# EAGLE board CRD (EAGLE 9.5.2)

Size 160 x 100 mm. Coordinates in mm from the lower left corner, seen from the top.
Outline: 0,0 160,0 160,100 0,100 0,0
Copper layers (1*16): Top 0.035mm / dielectric 1.5mm / Bottom 0.035mm
Design rules "default": minimum track width 6mil, minimum drill 0.35mm, track to track 6mil, track to pad 6mil, pad to pad 6mil, via to via 6mil, smd to smd 6mil, copper to edge 40mil, drill to drill 6mil, minimum pad ring 10mil, minimum via ring 8mil, stop-mask expansion 4mil, vias tented up to drill 0mil, thermal gap 10mil

## Footprints (pad centres in the part's own frame; a part is rotated, then mirrored left to right if it is on the bottom)
RES_1206 = smd 1.08 x 1.68: 1 -1.445,0; 2 1.445,0
MOLEX_73366-0061_0 = drill 1.17 pad 1.82 square: 1 0,0 | drill 1.52 pad 2.32: 2 -2.54,2.54; 3 2.54,2.54; 4 -2.54,-2.54; 5 2.54,-2.54
CAP_1206 = smd 1.29 x 1.91: 1 -1.46,0; 2 1.46,0
CAPPRD150W45D400H700 = drill 0.7 pad 1.05: N 0.75,0 | drill 0.7 pad 1.05 square: P -0.75,0
SOIC127P600X155-14N = smd 1.968 x 0.589: 1 -2.473,3.81; 2 -2.473,2.54; 3 -2.473,1.27; 4 -2.473,0; 5 -2.473,-1.27; 6 -2.473,-2.54; 7 -2.473,-3.81; 8 2.473,-3.81; 9 2.473,-2.54; 10 2.473,-1.27; 11 2.473,0; 12 2.473,1.27; 13 2.473,2.54; 14 2.473,3.81
SOIC127P1032X265-8N = smd 2.052 x 0.602: 1 -4.654,1.905; 2 -4.654,0.635; 3 -4.654,-0.635; 4 -4.654,-1.905; 5 4.654,-1.905; 6 4.654,-0.635; 7 4.654,0.635; 8 4.654,1.905
DO35-10 = drill 0.813 long: A 5.08,0; C -5.08,0
SOIC127P1032X265-16N = smd 2.052 x 0.602: 1 -4.654,4.445; 2 -4.654,3.175; 3 -4.654,1.905; 4 -4.654,0.635; 5 -4.654,-0.635; 6 -4.654,-1.905; 7 -4.654,-3.175; 8 -4.654,-4.445; 9 4.654,-4.445; 10 4.654,-3.175; 11 4.654,-1.905; 12 4.654,-0.635; 13 4.654,0.635; 14 4.654,1.905; 15 4.654,3.175; 16 4.654,4.445
1X04 = drill 1.016 long: 1 -3.81,0; 2 -1.27,0; 3 1.27,0; 4 3.81,0
1X02 = drill 1.016 long: 1 -1.27,0; 2 1.27,0
L1812 = smd 1.9 x 3.4: 1 -1.95,0; 2 1.95,0
1X08 = drill 1.016 long: 1 -8.89,0; 2 -6.35,0; 3 -3.81,0; 4 -1.27,0; 5 1.27,0; 6 3.81,0; 7 6.35,0; 8 8.89,0
SOIC127P600X175-16N = smd 1.746 x 0.592: 1 -2.585,4.445; 2 -2.585,3.175; 3 -2.585,1.905; 4 -2.585,0.635; 5 -2.585,-0.635; 6 -2.585,-1.905; 7 -2.585,-3.175; 8 -2.585,-4.445; 9 2.585,-4.445; 10 2.585,-3.175; 11 2.585,-1.905; 12 2.585,-0.635; 13 2.585,0.635; 14 2.585,1.905; 15 2.585,3.175; 16 2.585,4.445
SOT95P240X110-6N = smd 1.18 x 0.609: 1 -1.024,0.95; 2 -1.024,0; 3 -1.024,-0.95; 4 1.024,-0.95; 5 1.024,0; 6 1.024,0.95
1S7A_0505D15UP = drill 1 pad 1.5: 1 0,0; 2 2.54,0; 4 7.62,0; 5 10.16,0; 6 12.7,0
RESAD724W46L381D178B = drill 0.66 pad 1.26: 1 -3.62,0; 2 3.62,0
SOP65P490X110-8N = smd 1.939 x 0.497: 1 -1.915,0.975; 2 -1.915,0.325; 3 -1.915,-0.325; 4 -1.915,-0.975; 5 1.915,-0.975; 6 1.915,-0.325; 7 1.915,0.325; 8 1.915,0.975
DFN-8-EXTRA = smd 0.5 x 1.8: 0 0,0 | smd 0.6 x 0.3: 1 -0.9,0.75; 2 -0.9,0.25; 3 -0.9,-0.25; 4 -0.9,-0.75; 5 0.9,-0.75; 6 0.9,0.25; 7 0.9,-0.25; 8 0.9,0.75

## Placement (x,y rotation side)
52.3  100k  [RES_1206]  -85.09,-35.56 0 top  (outside the outline)
BIAS  MOLEX_73366-0061MOLEX_73366-0061_0_0  [MOLEX_73366-0061_0]  -77.47,34.29 0 top  (outside the outline)
C1  0.1u  [CAP_1206]  -81.28,54.61 0 top  (outside the outline)
C2  6.8u  [CAPPRD150W45D400H700]  -15.24,45.72 0 top  (outside the outline)
C3  0.1u  [CAP_1206]  -15.24,64.77 0 top  (outside the outline)
C4  6.8u  [CAPPRD150W45D400H700]  -21.59,45.72 0 top  (outside the outline)
C5  0.1u  [CAP_1206]  -21.59,64.77 0 top  (outside the outline)
C6  6.8u  [CAPPRD150W45D400H700]  -27.94,45.72 0 top  (outside the outline)
C7  0.1u  [CAP_1206]  -27.94,64.77 0 top  (outside the outline)
C8  6.8u  [CAPPRD150W45D400H700]  -34.29,45.72 0 top  (outside the outline)
C9  0.1u  [CAP_1206]  -34.29,64.77 0 top  (outside the outline)
C10  0.1u  [CAP_1206]  -40.64,64.77 0 top  (outside the outline)
C11  6.8u  [CAPPRD150W45D400H700]  -40.64,45.72 0 top  (outside the outline)
C12  6.8u  [CAPPRD150W45D400H700]  -46.99,45.72 0 top  (outside the outline)
C13  0.1u  [CAP_1206]  -46.99,64.77 0 top  (outside the outline)
C14  0.1u  [CAP_1206]  -53.34,64.77 0 top  (outside the outline)
C15  4.7u  [CAP_1206]  -59.69,64.77 0 top  (outside the outline)
C16  4.7u  [CAP_1206]  -66.04,64.77 0 top  (outside the outline)
C17  0.1u  [CAP_1206]  -72.39,64.77 0 top  (outside the outline)
C18  6.8u  [CAPPRD150W45D400H700]  -53.34,45.72 0 top  (outside the outline)
C19  6.8u  [CAPPRD150W45D400H700]  -59.69,45.72 0 top  (outside the outline)
C20  6.8u  [CAPPRD150W45D400H700]  -66.04,45.72 0 top  (outside the outline)
C21  0.1u  [CAP_1206]  -85.09,-13.97 0 top  (outside the outline)
C22  100p  [CAP_1206]  -85.09,-41.91 0 top  (outside the outline)
C23  0.1u  [CAP_1206]  10.16,85.09 0 top
C24  6.8u  [CAPPRD150W45D400H700]  -72.39,45.72 0 top  (outside the outline)
C25  0.1u  [CAP_1206]  -15.24,72.39 0 top  (outside the outline)
C26  6.8u  [CAPPRD150W45D400H700]  -78.74,45.72 0 top  (outside the outline)
C27  0.1u  [CAP_1206]  -21.59,72.39 0 top  (outside the outline)
C28  6.8u  [CAPPRD150W45D400H700]  -15.24,55.88 0 top  (outside the outline)
C29  0.1u  [CAP_1206]  -27.94,72.39 0 top  (outside the outline)
C30  6.8u  [CAPPRD150W45D400H700]  -21.59,55.88 0 top  (outside the outline)
C31  0.1u  [CAP_1206]  -34.29,72.39 0 top  (outside the outline)
C32  6.8u  [CAPPRD150W45D400H700]  -27.94,55.88 0 top  (outside the outline)
C33  0.1u  [CAP_1206]  -40.64,72.39 0 top  (outside the outline)
C34  6.8u  [CAPPRD150W45D400H700]  -34.29,55.88 0 top  (outside the outline)
C35  0.1u  [CAP_1206]  -46.99,72.39 0 top  (outside the outline)
C36  6.8u  [CAPPRD150W45D400H700]  -40.64,55.88 0 top  (outside the outline)
C37  0.1u  [CAP_1206]  -53.34,72.39 0 top  (outside the outline)
C38  0.1u  [CAP_1206]  -59.69,72.39 0 top  (outside the outline)
C39  0.1u  [CAP_1206]  -66.04,72.39 0 top  (outside the outline)
C40  6.8u  [CAPPRD150W45D400H700]  -46.99,55.88 0 top  (outside the outline)
C41  6.8u  [CAPPRD150W45D400H700]  -53.34,55.88 0 top  (outside the outline)
C42  6.8u  [CAPPRD150W45D400H700]  -59.69,55.88 0 top  (outside the outline)
C43  47n  [CAP_1206]  -85.09,-21.59 0 top  (outside the outline)
C44  47n  [CAP_1206]  -85.09,-29.21 0 top  (outside the outline)
COMP0  [SOIC127P600X155-14N]  -49.53,5.08 0 top  (outside the outline)
COMP1  [SOIC127P600X155-14N]  -57.15,5.08 0 top  (outside the outline)
COMP2  [SOIC127P600X155-14N]  -64.77,5.08 0 top  (outside the outline)
COMP3  [SOIC127P600X155-14N]  -72.39,5.08 0 top  (outside the outline)
COMP4  [SOIC127P600X155-14N]  -80.01,5.08 0 top  (outside the outline)
COMP5  [SOIC127P600X155-14N]  -16.51,22.86 0 top  (outside the outline)
COUNT0  [SOIC127P1032X265-8N]  -26.67,21.59 0 top  (outside the outline)
COUNT1  [SOIC127P1032X265-8N]  -39.37,21.59 0 top  (outside the outline)
COUNT2  [SOIC127P1032X265-8N]  -52.07,21.59 0 top  (outside the outline)
COUNT3  [SOIC127P1032X265-8N]  -64.77,21.59 0 top  (outside the outline)
COUNT4  [SOIC127P1032X265-8N]  -77.47,21.59 0 top  (outside the outline)
COUNT5  [SOIC127P1032X265-8N]  -19.05,34.29 0 top  (outside the outline)
COUNT6  [SOIC127P1032X265-8N]  -31.75,34.29 0 top  (outside the outline)
COUNT7  [SOIC127P1032X265-8N]  -44.45,34.29 0 top  (outside the outline)
D1  BAT19  [DO35-10]  -76.2,72.39 0 top  (outside the outline)
DAC0  [SOIC127P1032X265-16N]  -19.05,7.62 0 top  (outside the outline)
DAC1  [SOIC127P1032X265-16N]  -31.75,7.62 0 top  (outside the outline)
ENCODER  [1X04]  -91.44,-49.53 0 top  (outside the outline)
I2C  [1X02]  -38.1,83.82 0 top  (outside the outline)
L2  47u  [L1812]  -66.04,54.61 0 top  (outside the outline)
LEVELS  [1X08]  -36.83,77.47 0 top  (outside the outline)
MULT0  [SOIC127P600X175-16N]  -41.91,5.08 0 top  (outside the outline)
POW0  [SOT95P240X110-6N]  17.78,82.55 0 top
POW1  1S7A_0512D1.5UP  [1S7A_0505D15UP]  -69.85,36.83 0 top  (outside the outline)
POWER  [1X02]  -17.78,83.82 0 top  (outside the outline)
PREAMP  [1X02]  -93.98,-63.5 0 top  (outside the outline)
R1  100k  [RES_1206]  -44.45,85.09 0 top  (outside the outline)
R2  100k  [RES_1206]  -49.53,85.09 0 top  (outside the outline)
R3  100k  [RES_1206]  -54.61,85.09 0 top  (outside the outline)
R4  100k  [RES_1206]  -59.69,85.09 0 top  (outside the outline)
R5  100k  [RES_1206]  -64.77,85.09 0 top  (outside the outline)
R6  100k  [RES_1206]  -69.85,85.09 0 top  (outside the outline)
R7  100k  [RES_1206]  -74.93,85.09 0 top  (outside the outline)
R8  100k  [RES_1206]  -80.01,85.09 0 top  (outside the outline)
R9  200k  [RES_1206]  -15.24,91.44 0 top  (outside the outline)
R10  100k  [RES_1206]  -20.32,91.44 0 top  (outside the outline)
R11  0  [RESAD724W46L381D178B]  -92.71,-55.88 0 top  (outside the outline)
R14  100k  [RES_1206]  -25.4,91.44 0 top  (outside the outline)
R15  100k  [RES_1206]  -30.48,91.44 0 top  (outside the outline)
R16  100k  [RES_1206]  -35.56,91.44 0 top  (outside the outline)
R17  100k  [RES_1206]  -40.64,91.44 0 top  (outside the outline)
R18  100k  [RES_1206]  -45.72,91.44 0 top  (outside the outline)
R19  100k  [RES_1206]  -50.8,91.44 0 top  (outside the outline)
R22  147k  [RES_1206]  -55.88,91.44 0 top  (outside the outline)
R23  6.34k  [RES_1206]  -60.96,91.44 0 top  (outside the outline)
RTD0  [SOP65P490X110-8N]  -22.86,77.47 0 top  (outside the outline)
RTD1  [1X04]  -53.34,77.47 0 top  (outside the outline)
RTD2  [1X04]  -64.77,77.47 0 top  (outside the outline)
SIGNAL  MOLEX_73366-0061MOLEX_73366-0061_0_0  [MOLEX_73366-0061_0]  -92.71,-40.64 0 top  (outside the outline)
U1  AD8317L  [DFN-8-EXTRA]  -86.36,2.54 0 top  (outside the outline)

## Library data of the parts
52.3 R1-R10 R14-R19 R22 R23 = Resistor_Capacitor; CREATED_BY: PCBLayout.com; DIGIKEY_PART_NUMBER: P0.0ETR-ND; MANUFACTURER: Panasonic Electronic Components; MPN: ERJ-8GEY0R00V; PACKAGE: SMD 1206
BIAS SIGNAL = Molex - 73366-0061; AUTOMOTIVE: No; CENTROID_NOT_SPECIFIED: No; CONN_ORIENTATION: Straight; CONTACT_MATERIAL: Gold,Nickel; DATASHEET: https://www.molex.com/webdocs/datasheets/pdf/en-us/0733660061_RF_COAX_CONNECTORS.pdf; DEVICE_CLASS_L1: Connectors; DEVICE_CLASS_L2: RF / Coaxial Connectors; DEVICE_CLASS_L3: unset; DIELECTRIC_MATERIAL: PTFE; DIGIKEY_DESCRIPTION: CONN MCX JACK STR 50 OHM PCB; DIGIKEY_PART_NUMBER: WM5541-ND; FOOTPRINT_URL: https://www.molex.com/pdm_docs/sd/733660061_sd.pdf; FOOTPRINT_VARIANT_NAME_0: Recommended_Land_Pattern; FREQUENCY: 6GHz; HEIGHT: 5.23mm; IMPEDANCE: 50Ω; IS_FEMALE: yes; LEAD_FREE: Yes; MF: Molex; MFG_PACKAGE_IDENT: 0; MFG_PACKAGE_IDENT_DATE: 0; MFG_PACKAGE_IDENT_REV: 0; MOUSER_DESCRIPTION: RF Connectors / Coaxial Connectors MCX PCB JACK; MOUSER_PART_NUMBER: 538-73366-0061; MPN: 73366-0061; NUMBER_OF_CONTACTS: 1; PACKAGE: CONN_JACK; PREFIX: J; ROHS: Yes; SHIELDING: true; STANDOFF_HEIGHT: 0.05mm; TEMPERATURE_RANGE_HIGH: +155°C; TEMPERATURE_RANGE_LOW: -55°C; VERIFICATION_VERSION: 0.0.0.3; VOLTAGE_RATING: 335V
C1 C3 C5 C7 C9 C10 C13-C17 C21-C23 C25 C27 C29 C31 C33 C35 C37-C39 C43 C44 = Resistor_Capacitor; CREATED_BY: PCBLayout.com; DIGIKEY_PART_NUMBER: GRM31CR60J107ME39L; MANUFACTURER: Murata Electronics North America; MPN: GRM31CR60J107ME39L; PACKAGE: SMD 1206
C2 C4 C6 C8 C11 C12 C18-C20 C24 C26 C28 C30 C32 C34 C36 C40-C42 = EEAGA1V6R8; DESCRIPTION: CAP ALUM 6.8UF 20% 35V RADIAL; DIGI-KEY_PART_NUMBER: P14493-ND; MF: Panasonic; MP: EEAGA1V6R8; PACKAGE: RADIAL-2 Panasonic; PURCHASE-URL: https://pricing.snapeda.com/search/part/EEAGA1V6R8/?ref=eda
COMP0 COMP1-COMP5 COUNT0 COUNT1-COUNT7 DAC0 DAC1 MULT0 POW0 RTD0 = CRD
D1 = diode
ENCODER I2C LEVELS POWER PREAMP RTD1 RTD2 = pinhead
L2 = rcl; SPICEPREFIX: L
POW1 = 1S7A_0512D1.5UP; DESCRIPTION: 1W ? Dual Output DC-DC Converter - Fixed Input - Isolated & Unregulated; HEIGHT: 10.41mm; MANUFACTURER_NAME: Gaptec; MANUFACTURER_PART_NUMBER: 1S7A_0512D1.5UP
R11 = Resistor; CATEGORY: Resistor; SUB-CATEGORY: Fixed
U1 = AD8317; AVAILABILITY: In Stock; DESCRIPTION: Logarithmic Amplifier IC Receiver Signal Strength Indication (RSSI) 8-LFCSP-VD (3x2); MF: Analog Devices; MP: AD8317; PACKAGE: LFCSP-8 Analog Devices; PRICE: None; PURCHASE-URL: https://pricing.snapeda.com/search/part/AD8317/?ref=eda

## Nets
+5V: C1.2 C2.N C3.2 C4.N C5.2 C6.N C7.2 C8.N C9.2 C10.2 C11.N C12.N C13.2 C14.2 C15.2 C17.2 C18.N C19.N C20.N C21.2 C22.2 C23.2 C24.N C25.2 C26.N C27.2 C28.N C29.2 C30.N C31.2 C32.N C33.2 C34.N C35.2 C36.N C37.2 C38.2 C39.2 C40.N C41.N C42.N COMP0.4 COMP1.4 COMP2.4 COMP3.4 COMP4.4 COMP5.4 COUNT0.3 COUNT0.8 COUNT1.3 COUNT1.8 COUNT2.3 COUNT2.8 COUNT3.3 COUNT3.8 COUNT4.8 COUNT5.8 COUNT6.8 COUNT7.8 DAC0.3 DAC0.4 DAC0.12 DAC0.13 DAC0.14 DAC1.3 DAC1.4 DAC1.9 DAC1.12 DAC1.13 DAC1.14 ENCODER.4 L2.2 MULT0.16 POW0.4 POW0.5 POW1.1 POWER.1 R1.1 RTD0.8 RTD2.3 RTD2.4 U1.7
+12V: POW1.6 PREAMP.1
-12V: POW1.4
AND0: COMP2.3 R3.1 R4.1
AND1: COMP2.5 R5.2 R6.2
AND2: COMP2.10 R2.1 R7.1
AND3: COMP2.12 R8.2 R14.2
AND4: COMP5.3 R10.1 R17.1
AND5: COMP5.5 R15.2 R16.2
AND6: COMP5.12 R18.1 R19.1
BIN0: COMP2.1 COUNT0.1
BIN1: COMP2.7 COUNT1.1
BIN2: COMP2.8 COUNT2.1
BIN3: COMP2.14 COUNT3.1
BIN4: COMP5.1 COUNT4.1
BIN5: COMP5.7 COUNT5.1
BIN6: COMP5.14 COUNT6.1
ENCODER: COUNT7.1
GND: 52.3.2 BIAS.2 BIAS.3 BIAS.4 BIAS.5 C1.1 C2.P C3.1 C4.P C5.1 C6.P C7.1 C8.P C9.1 C10.1 C11.P C12.P C13.1 C14.1 C15.1 C16.1 C17.1 C18.P C19.P C20.P C21.1 C22.1 C23.1 C24.P C25.1 C26.P C27.1 C28.P C29.1 C30.P C31.1 C32.P C33.1 C34.P C35.1 C36.P C37.1 C38.1 C39.1 C40.P C41.P C42.P C44.2 COMP0.11 COMP1.11 COMP2.11 COMP3.11 COMP5.11 COUNT0.4 COUNT1.4 COUNT2.4 COUNT3.4 COUNT4.3 COUNT4.4 COUNT5.3 COUNT5.4 COUNT6.3 COUNT6.4 COUNT7.3 COUNT7.4 DAC0.5 DAC0.6 DAC0.9 DAC0.10 DAC0.11 DAC1.5 DAC1.6 DAC1.10 DAC1.11 ENCODER.1 MULT0.1 MULT0.2 MULT0.8 MULT0.13 POW0.1 POW0.2 POW1.2 POW1.5 PREAMP.2 R9.2 R11.2 R23.1 RTD0.4 RTD0.5 RTD0.6 RTD0.7 RTD1.4 RTD2.2 SIGNAL.2 SIGNAL.3 SIGNAL.4 SIGNAL.5
GND2: POWER.2 R11.1
LEVEL0: COMP0.2 DAC0.2 LEVELS.1
LEVEL1: COMP0.5 COMP0.9 DAC0.1 LEVELS.2
LEVEL2: COMP0.12 COMP1.2 DAC0.16 LEVELS.3
LEVEL3: COMP1.5 COMP1.9 DAC0.15 LEVELS.4
LEVEL4: COMP1.12 COMP3.2 DAC1.2 LEVELS.5
LEVEL5: COMP3.5 COMP3.9 DAC1.1 LEVELS.6
LEVEL6: COMP3.12 COMP4.2 DAC1.16 LEVELS.7
LEVEL7: COMP4.5 DAC1.15 LEVELS.8
N$1: COMP0.1 R3.2
N$2: COMP0.7 R4.2
N$3: COMP0.14 R5.1
N$4: COMP0.8 R6.1
N$5: COMP1.1 R2.2
N$6: COMP1.7 R7.2
N$7: COMP1.14 R8.1
N$8: COMP1.8 R14.1
N$9: C43.2 U1.1
N$10: C44.1 U1.8
N$11: D1.A L2.1 POW0.6
N$12: POW0.3 R22.1 R23.2
N$13: COMP2.2 COMP2.6 COMP2.9 COMP2.13 COMP5.2 COMP5.6 COMP5.13 R1.2 R9.1
N$14: COMP3.1 R10.2
N$15: COMP3.14 R15.1
N$16: COMP3.8 R16.1
N$17: COMP3.7 R17.2
N$18: COMP4.1 R18.2
N$19: COMP4.7 R19.2
N$20: 52.3.1 C43.1
N$21: RTD2.1
OUTA: ENCODER.3
OUTB: ENCODER.2
RESET: MULT0.3
SC0: COUNT0.6 COUNT4.6 MULT0.5
SC1: COUNT1.6 COUNT5.6 MULT0.7
SC2: COUNT2.6 COUNT6.6 MULT0.10
SC3: COUNT3.6 COUNT7.6 MULT0.12
SCL: DAC0.7 DAC1.7 I2C.1 MULT0.14 RTD0.2 RTD1.2
SD0: COUNT0.5 COUNT4.5 MULT0.4
SD1: COUNT1.5 COUNT5.5 MULT0.6
SD2: COUNT2.5 COUNT6.5 MULT0.9
SD3: COUNT3.5 COUNT7.5 MULT0.11
SDA: DAC0.8 DAC1.8 I2C.2 MULT0.15 RTD0.1 RTD1.1
SIGNAL: COMP0.3 COMP0.6 COMP0.10 COMP0.13 COMP1.3 COMP1.6 COMP1.10 COMP1.13 COMP3.3 COMP3.6 COMP3.10 COMP3.13 COMP4.3 COMP4.6 SIGNAL.1
VIN: BIAS.1 C16.2 D1.C R22.2

## Tracks (layer width: path | path; a pad name or v marks a point on that pad's centre or on a via)
+5V  (81 unrouted)
+12V  (1 unrouted)
AND0  (2 unrouted)
AND1  (2 unrouted)
AND2  (2 unrouted)
AND3  (2 unrouted)
AND4  (2 unrouted)
AND5  (2 unrouted)
AND6  (2 unrouted)
BIN0  (1 unrouted)
BIN1  (1 unrouted)
BIN2  (1 unrouted)
BIN3  (1 unrouted)
BIN4  (1 unrouted)
BIN5  (1 unrouted)
BIN6  (1 unrouted)
GND  (96 unrouted)
GND2  (1 unrouted)
LEVEL0  (2 unrouted)
LEVEL1  (3 unrouted)
LEVEL2  (3 unrouted)
LEVEL3  (3 unrouted)
LEVEL4  (3 unrouted)
LEVEL5  (3 unrouted)
LEVEL6  (3 unrouted)
LEVEL7  (2 unrouted)
N$1  (1 unrouted)
N$2  (1 unrouted)
N$3  (1 unrouted)
N$4  (1 unrouted)
N$5  (1 unrouted)
N$6  (1 unrouted)
N$7  (1 unrouted)
N$8  (1 unrouted)
N$9  (1 unrouted)
N$10  (1 unrouted)
N$11  (2 unrouted)
N$12  (2 unrouted)
N$13  (8 unrouted)
N$14  (1 unrouted)
N$15  (1 unrouted)
N$16  (1 unrouted)
N$17  (1 unrouted)
N$18  (1 unrouted)
N$19  (1 unrouted)
N$20  (1 unrouted)
SC0  (2 unrouted)
SC1  (2 unrouted)
SC2  (2 unrouted)
SC3  (2 unrouted)
SCL  (5 unrouted)
SD0  (2 unrouted)
SD1  (2 unrouted)
SD2  (2 unrouted)
SD3  (2 unrouted)
SDA  (5 unrouted)
SIGNAL  (14 unrouted)
VIN  (3 unrouted)